# Altium PCB PCB1.PcbDoc
Units mil, origin at the board's own origin, x right, y up, seen from the top; angles counter-clockwise.
Board outline 6000 x 4000 mil, 2 copper layers (Top Layer, Bottom Layer); 25 components, 29 nets, 111 pads, 0 vias.
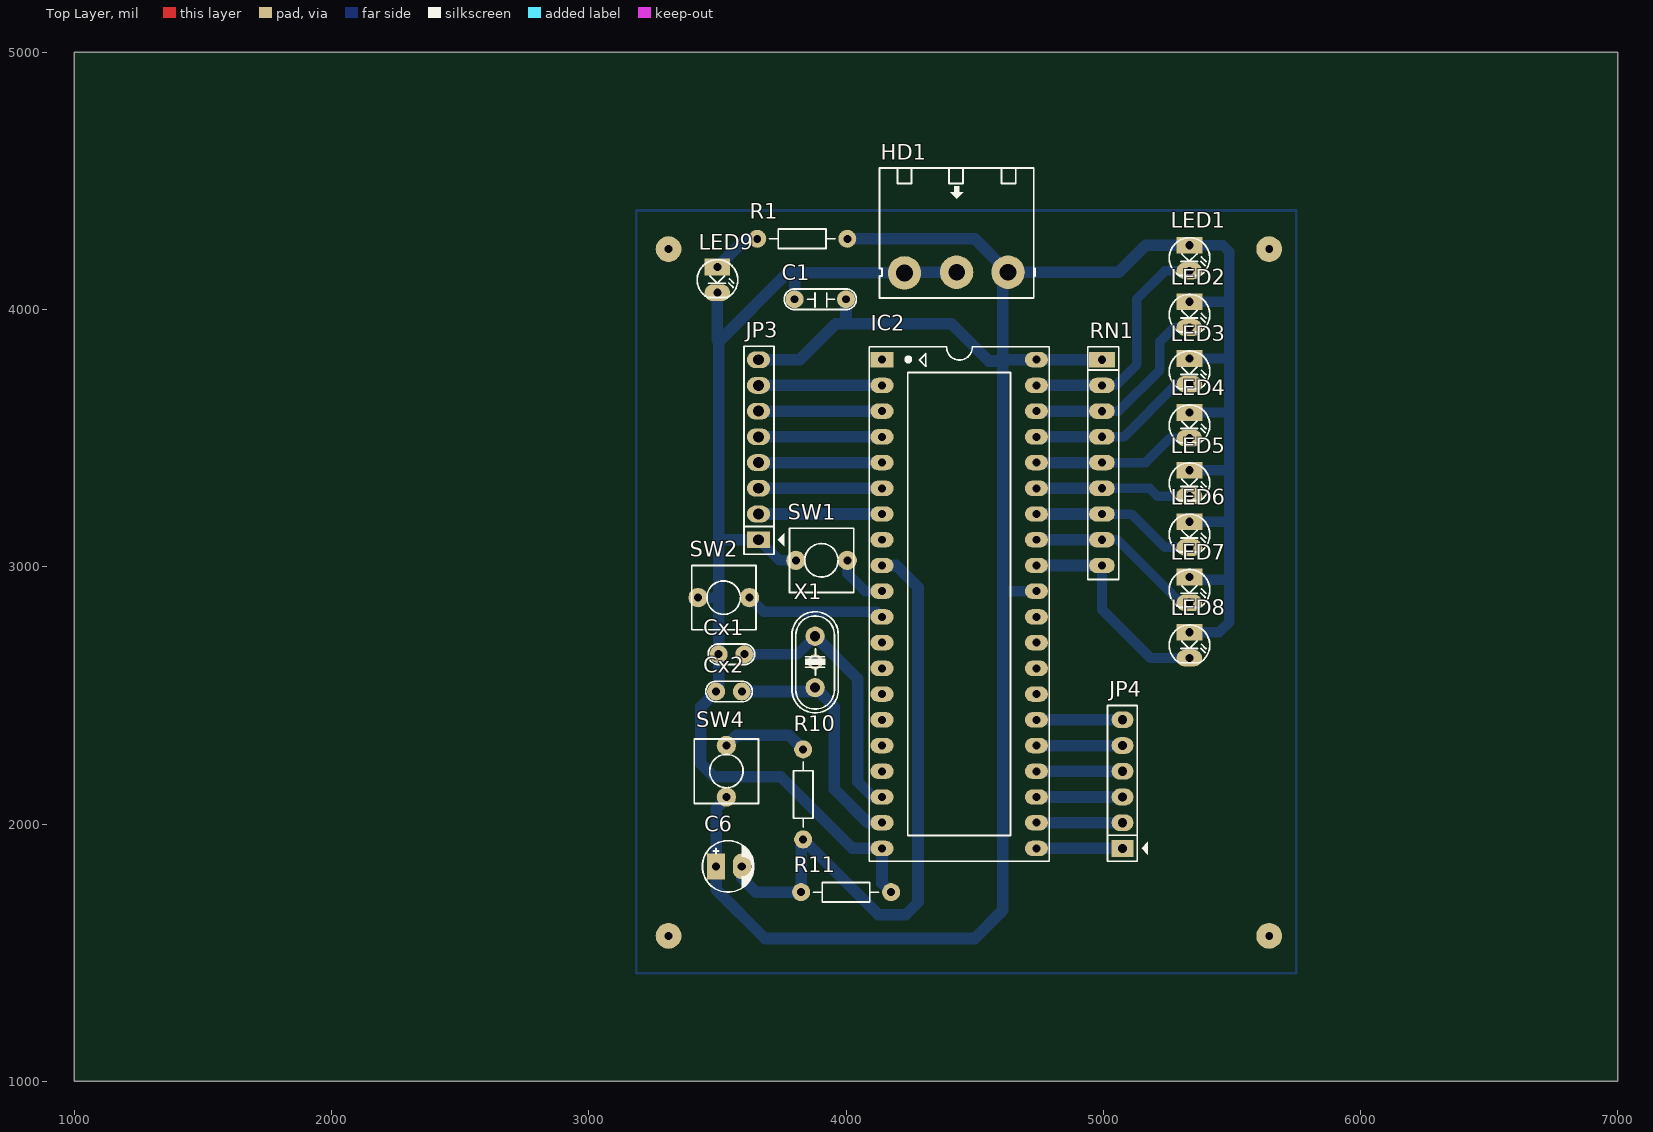
[diagram p0: Top Layer view]
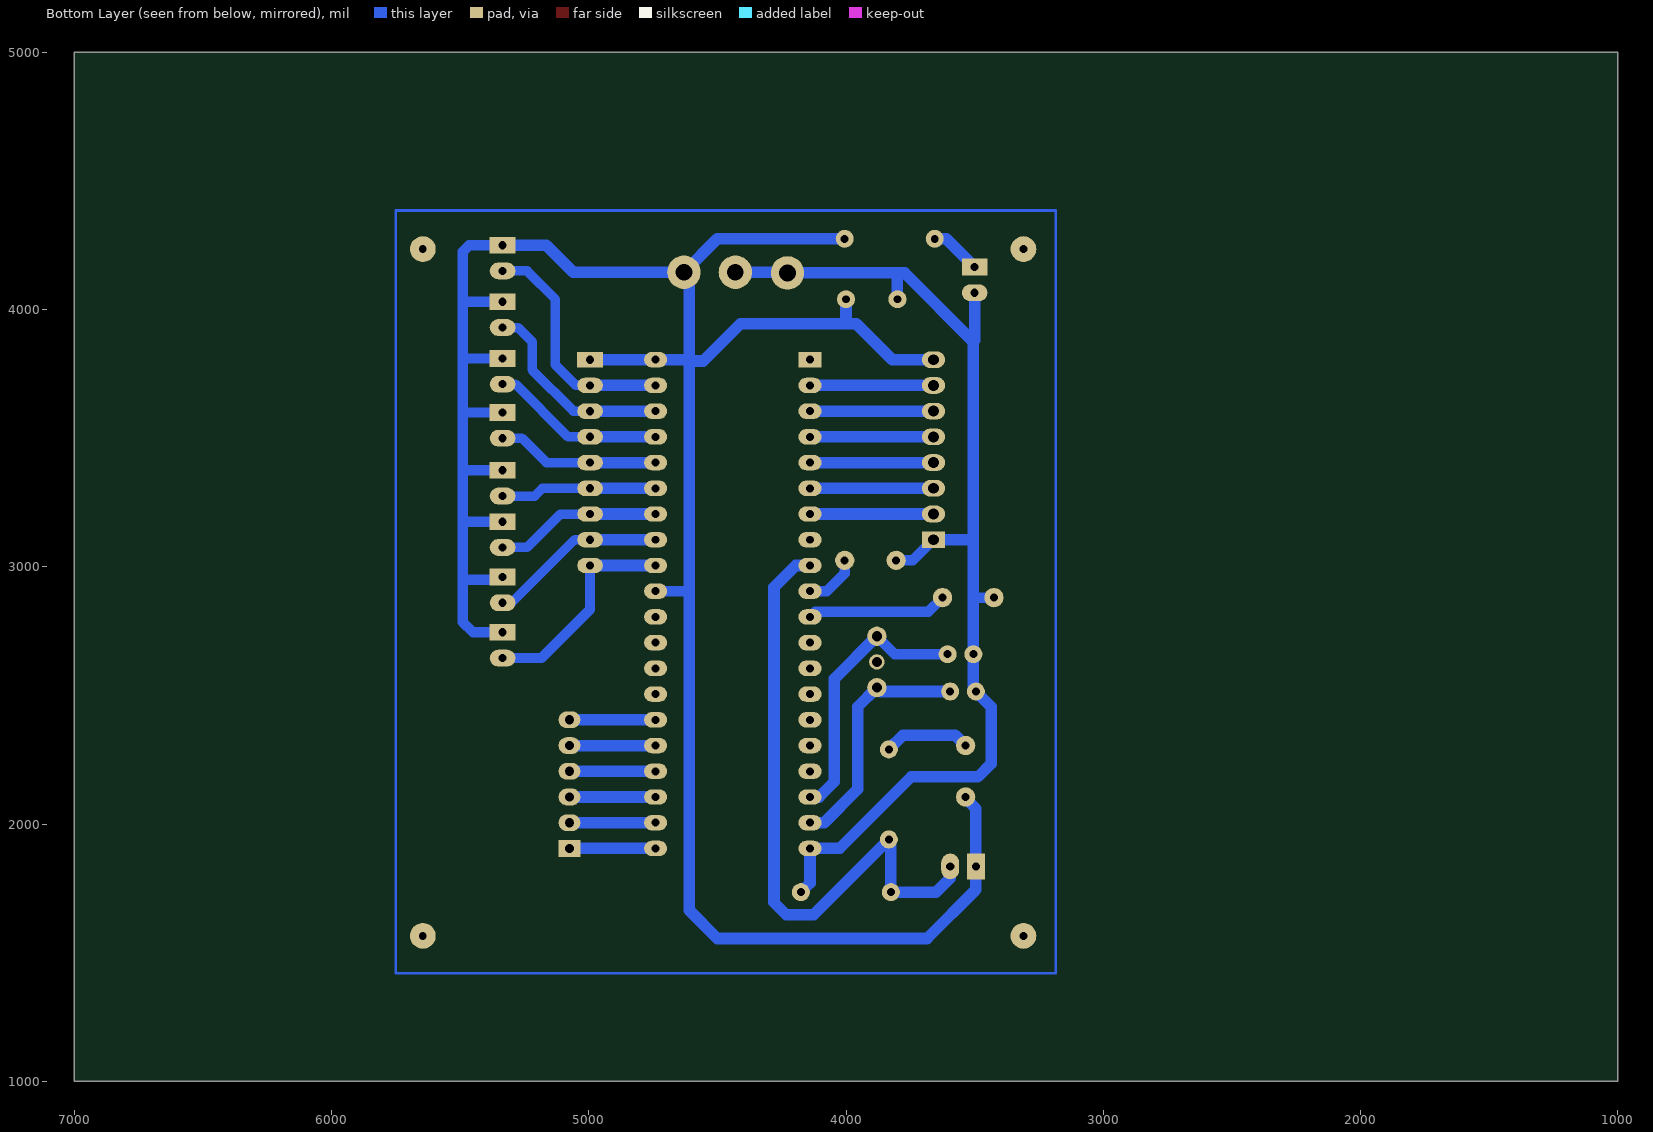
[diagram p1: Bottom Layer view, seen from below]

## Layer stack, top to bottom
Top Solder: solder mask 0.4, Solder Resist, Dk 3.5
Top Layer: signal copper 1.4
Dielectric 1: dielectric 12.6, FR-4, Dk 4.8
Bottom Layer: signal copper 1.4
Bottom Solder: solder mask 0.4, Solder Resist, Dk 3.5

## Board outline
1000,1000 7000,1000 7000,5000 1000,5000

## Design rules (kind name [scope] priority, off if disabled: settings)
Clearance [All] p1: gap=18
PlaneConnect [All] p1: planeconnectstyle=Relief reliefexpansion=20 reliefentries=4 reliefconductorwidth=20 reliefairgap=10
PolygonConnect [All] p1: connectstyle=Relief reliefconductorwidth=20 reliefentries=4 polygonreliefangle="90 Angle" airgapwidth=10
RoomDefinition "Skematic AT89C51" [InComponentClass('Skematic AT89C51')] p1: confinementstyle=ConfineIn formatcopy=TRUE lockcomponents=FALSE outline 7985,815 11315,815 11315,2995 7985,2995
RoutingVias [All] p1: holewidth=35 width=65 viastyle="Through Hole" minholewidth=35 minwidth=65 maxholewidth=35 maxwidth=65
SolderMaskExpansion [All] p1: expansion=4
Width [All] p1: maxlimit=55 minlimit=24 preferedwidth=45
29 further rules are at their usual default settings.

## Components (designator, comment, footprint, x,y, rotation, side; value= is the part's Value field where it differs from the comment)
C1 "104" CN2 4000,4040 r180 top
C6 "10uF" CP1/2 3495,1835 r0 top
Cx1 "33pF" CN1 3605,2660 r180 top
Cx2 "33pF" CN1 3495,2515 r0 top
HD1 "Header 3" HED3T 4630,4145 r180 top
IC2 "AT89C52" DIP40/W0.6 4140,3805 r270 top
JP3 "JP8 PIN" JP8 3660,3105 r90 top
JP4 "JP6 PIN" JP6 5075,1905 r90 top
LED1 "LED" LED-3 5335,4250 r270 top
LED2 "LED" LED-3 5335,4030 r270 top
LED3 "LED" LED-3 5335,3810 r270 top
LED4 "LED" LED-3 5335,3600 r270 top
LED5 "LED" LED-3 5335,3375 r270 top
LED6 "LED" LED-3 5335,3175 r270 top
LED7 "LED" LED-3 5335,2960 r270 top
LED8 "LED" LED-3 5335,2745 r270 top
LED9 "LED" LED-3 3500,4165 r270 top
R1 "1k" R1/4W 4005,4275 r180 top
R10 "100" R1/4W 3833.44,2290 r270 top
R11 "10k" R1/4W 4175.44,1735 r180 top
RN1 "10K" RN8 4995,3805 r270 top
SW1 "SW" SW2 3805,3025 r0 top
SW2 "SW" SW2 3425,2880 r0 top
SW4 "SW" SW2 3535,2305 r270 top
X1 "12Mhz" XT2 3880,2630 r90 top

## Footprints (in the part's own frame and the unit in brackets; to place one, negate y for a bottom-side part, rotate by r counter-clockwise, add the part's x,y. Pads: shape width x height; smd on the part's side, far side on the other; paste and mask are expansions set on the pad)
CN1 [mil]
  round 70 hole 31: 1(0,0) 2(100,0)
  silkscreen extent -40,-40 141,40, body extent -60,-30 170,37, height 265
CN2 [mil]
  round 70 hole 31: 1(0,0) 2(200,0)
  silkscreen extent -40,-40 240,40, body extent -54,-44 260,55, height 407
CP1/2 [mil] "Tu hoa < 22uF/16>50V"
  rect 70x100 hole 32: 1(0,0)
  oval 70x100 hole 32: 2(100,0)
  silkscreen extent -53,-100 147,100, body extent -49,-99 149,99, height 287
DIP40/W0.6 [mil] "40 PIN, W 600mil, Pin to pin 100mil"
  rect 60x90 hole 31: 1(0,0)
  oval 60x90 hole 31: 2(100,0) 3(200,0) 4(300,0) 5(400,0) 6(500,0) 7(600,0) 8(700,0) 9(800,0) 10(900,0) 11(1000,0) 12(1100,0) 13(1200,0) 14(1300,0) 15(1400,0) 16(1500,0) 17(1600,0) 18(1700,0) 19(1800,0) 20(1900,0) 21(1900,600) 22(1800,600) 23(1700,600) 24(1600,600) 25(1500,600) 26(1400,600) 27(1300,600) 28(1200,600) 29(1100,600) 30(1000,600) 31(900,600) 32(800,600) 33(700,600) 34(600,600) 35(500,600) 36(400,600) 37(300,600) 38(200,600) 39(100,600) 40(0,600)
  silkscreen extent -50,-50 1950,650, body extent -82,-10 1982,600, height 224
HED3T [mil] "Header 3, 3 pin, hight 300mil, Pin to Pin 200, Colour Green"
  round 130 hole 65: 1(0,0) 2(200,0) 3(402.62,2.62)
  silkscreen extent -105,-405 500,100, body extent -95,-404 496,68, height 124
JP6 [mil] "JP6"
  rect 65x85 hole 36: 1(0,0)
  oval 65x85 hole 36: 2(100,0) 3(200,0) 4(300,0) 5(400,0) 6(500,0)
  silkscreen extent -50,-99 556,58, body extent -48,-50 548,48, height 323
JP8 [mil] "JP8"
  rect 65x90 hole 42: 1(0,0)
  oval 65x90 hole 42: 2(100,0) 3(200,0) 4(300,0) 5(400,0) 6(500,0) 7(600,0) 8(700,0)
  silkscreen extent -56,-100 752,57, body extent -48,-50 748,48, height 323
LED-3 [mil] "LED 2 PIN, 3ly Only colour"
  rect 65x100 hole 32: 1(0,0)
  oval 65x100 hole 32: 2(100,0)
  silkscreen extent -29,-78 118,79, body extent -29,-75 109,75, height 256
R1/4W [mil] "R 1/4W, 2 Pin, 350mil"
  round 70 hole 31: 1(0,0) 2(350,0)
  silkscreen extent 48,-38 302,38, body extent -40,-47 386,47, height 111
RN8 [mil] "R SIP8, 9 Pin"
  rect 60x100 hole 32: 1(0,0)
  oval 60x100 hole 32: 2(100,0) 3(200,0) 4(300,0) 5(400,0) 6(500,0) 7(600,0) 8(700,0) 9(800,0)
  silkscreen extent -50,-55 855,65, body extent -43,-44 843,5, height 259
SW2 [mil] "SW button 2pin, 250x 250 mil"
  round 75 hole 31: 1(0,0) 2(200,0)
  silkscreen extent -25,-125 225,125
XT2 [mm] "Footpin for Crystal 2 pin"
  round 1.524 hole 1: 0(0,0)
  round 1.905 hole 1: 1(-2.54,0) 2(2.54,0)
  silkscreen extent -5.03,-2.29 4.96,2.29, body extent -5.93,-2.36 5.42,2.29, height 3.5

## Part data
C1: library part CN2, "Cap np 104 => 105pF"
C6: library part CP1, "Cap P  0,1uF < 22uF , 16 - 50V"
Cx1 Cx2: library part CN0, "Cremic For Xtal 1pF => 100pF"
HD1: library part Hed3, "Header 3 (Green)"
IC2: "Atmel AT89C52, 8k Byte Flash Memory , 40 Pin"
JP3: library part JP8
JP4: library part JP6
LED1 LED2 LED3 LED4 LED5 LED6 LED7 LED8 LED9: "LED Single colour Green and Red"
R1 R10 R11: library part R, "Resistor 1/4W"
RN1: library part RN8, "Resistor 8 (Thanh)"
SW1 SW2 SW4: library part SW2, "Switch button 2 pin"
X1: library part XT2, "Crystal For all Crystal 2pin."

## Free pads (board coordinates)
  round 100 hole 30: 2(5645,4235) 7(3310,4235) 8(3310,1565) 9(5645,1565)

## Nets (pads, with @x,y where several pads share a name; then routed paths per layer and width w, separated by ;. In a path a pad name is that pad's centre, name@x,y a point inside that pad or via, vN(x,y) a via of type N, cw(c..) or ccw(c..) an arc to the next point about the centre after c; other vN are vias at no path point)
A: IC2.39 LED1.2 RN1.2 | length 928.7
  Bottom Layer w37: RN1.2 5050,3705 5130,3785 5130,4040 5240,4150 LED1.2
  Bottom Layer w45: IC2.39 RN1.2
B: IC2.38 LED2.2 RN1.3 | length 794.1
  Bottom Layer w37: RN1.3 5060,3605 5220,3765 5220,3875 5275,3930 LED2.2
  Bottom Layer w45: IC2.38 RN1.3
C: IC2.37 LED3.2 RN1.4 | length 679.9
  Bottom Layer w37: RN1.4 5080,3505 5285,3710 LED3.2
  Bottom Layer w45: IC2.37 RN1.4
D: IC2.36 LED4.2 RN1.5 | length 634.4
  Bottom Layer w37: RN1.5 5165,3405 5260,3500 LED4.2
  Bottom Layer w45: IC2.36 RN1.5
E: IC2.35 LED5.2 RN1.6 | length 607.4
  Bottom Layer w37: RN1.6 5180,3305 5210,3275 LED5.2
  Bottom Layer w45: IC2.35 RN1.6
F: IC2.34 LED6.2 RN1.7 | length 648.8
  Bottom Layer w37: RN1.7 5110,3205 5240,3075 LED6.2
  Bottom Layer w45: IC2.34 RN1.7
G: IC2.33 LED7.2 RN1.8 | length 696.5
  Bottom Layer w37: RN1.8 5055,3105 5300,2860 LED7.2
  Bottom Layer w45: IC2.33 RN1.8
GND: C1.2 Cx1.2 Cx2.1 HD1.2 HD1.3 IC2.20 JP3.1 LED9.2 R11.1 SW1.1 SW2.1 | length 4447.2
  Top Layer w10: IC2.20@4130,1895 IC2.20
  Bottom Layer w40: SW2.1@3440,2880 3495,2880 3505,2870 ; JP3.1 3740,3025 SW1.1
  Bottom Layer w45: LED9.2 3500,3880 3505,3875 ; JP3.1 3510,3105 3505,3110 ; C1.2 3800,4137.38 3795,4142.38 ; R11.1 4140,1770.44 IC2.20 4025,1905 3747,2183 3487,2183 3435,2235 3435,2455 Cx2.1 3505,2525 Cx1.2 3505,2870 3505,3110 ; HD1.2 4230,4145 HD1.3 3795,4142.38 ; 3505,3110 3505,3875 ; 3505,3875 3772.38,4142.38 3795,4142.38
H: IC2.32 LED8.2 RN1.9 | length 843.7
  Bottom Layer w40: RN1.9 4995,2835 5185,2645 LED8.2
  Bottom Layer w45: IC2.32 RN1.9
NetCx1_1: Cx1.1 IC2.18 X1.2 | length 1057.2
  Bottom Layer w40: Cx1.1 3810,2660 X1.2
  Bottom Layer w45: X1.2 4045,2565 4045,2165 4105,2105 IC2.18
NetCx2_2: Cx2.2 IC2.19 X1.1 | length 956.1
  Bottom Layer w45: Cx2.2 3865,2515 X1.1 3955,2455 3955,2135 4085,2005 IC2.19
NetIC2_2: IC2.2 JP3.7 | length 480
  Bottom Layer w45: JP3.7 IC2.2
NetIC2_3: IC2.3 JP3.6 | length 480
  Bottom Layer w45: JP3.6 IC2.3
NetIC2_4: IC2.4 JP3.5 | length 480
  Bottom Layer w45: JP3.5 IC2.4
NetIC2_5: IC2.5 JP3.4 | length 480
  Bottom Layer w45: JP3.4 IC2.5
NetIC2_6: IC2.6 JP3.3 | length 480
  Bottom Layer w45: JP3.3 IC2.6
NetIC2_7: IC2.7 JP3.2 | length 480
  Bottom Layer w45: JP3.2 IC2.7
NetIC2_10: IC2.10 SW1.2 | length 214
  Bottom Layer w40: SW1.2 4005,2975 4075,2905 IC2.10
NetIC2_11: IC2.11 SW2.2 | length 546.1
  Bottom Layer w40: SW2.2 3680,2825 4120,2825 IC2.11
NetIC2_21: IC2.21 JP4.1 | length 335
  Bottom Layer w45: IC2.21 JP4.1
NetIC2_22: IC2.22 JP4.2 | length 335
  Bottom Layer w45: IC2.22 JP4.2
NetIC2_23: IC2.23 JP4.3 | length 335
  Bottom Layer w45: IC2.23 JP4.3
NetIC2_24: IC2.24 JP4.4 | length 335
  Bottom Layer w45: IC2.24 JP4.4
NetIC2_25: IC2.25 JP4.5 | length 335
  Bottom Layer w45: IC2.25 JP4.5
NetIC2_26: IC2.26 JP4.6 | length 335
  Bottom Layer w45: IC2.26 JP4.6
NetLED9_1: LED9.1 R1.2 | length 200.6
  Bottom Layer w45: LED9.1 3610,4275 R1.2
NetR10_1: R10.1 SW4.1 | length 339.4
  Bottom Layer w45: SW4.1 3575,2345 3778.44,2345 R10.1 R10.1@3833.44,2291.56
RESET: C6.2 IC2.9 R10.2 R11.2 | length 2493.7
  Bottom Layer w45: C6.2 3595,1790 3650,1735 R11.2 3825.44,1932 R10.2 4125.44,1648 4233,1648 4280,1695 4280,2920 4195,3005 IC2.9
VCC: C1.1 C6.1 HD1.1 IC2.31 IC2.40 JP3.8 LED1.1 LED2.1 LED3.1 LED4.1 LED5.1 LED6.1 LED7.1 LED8.1 R1.1 RN1.1 SW4.2 | length 9938
  Bottom Layer w40: 4610,2905 IC2.31 ; LED8.1 5450,2745 5490,2785 5490,2950 ; LED7.1 5345,2950 5490,2950 ; LED6.1 5485,3175 5490,3180 ; LED5.1 5480,3375 5490,3365 ; LED4.1@5335,3599.19 LED4.1 5485,3600 5490,3595 ; LED3.1 5485,3810 5490,3805 ; LED2.1 5485,4030 5490,4035 ; LED1.1 5465,4250 5490,4225 5490,4035 ; 5490,2950 5490,3180 ; 5490,3180 5490,3365 ; 5490,3365 5490,3595 ; 5490,3595 5490,3805 ; 5490,3805 5490,4035
  Bottom Layer w45: SW4.2 3535,2100 3495,2060 C6.1 3495,1745 3685,1555 4500,1555 4610,1665 4610,2905 4610,3800 ; JP3.8 3820,3805 3960,3945 4005,3945 ; C1.1 4000,3950 4005,3945 ; R1.1 4500,4275 HD1.1 ; RN1.1 IC2.40 4615,3805 4610,3800 ; LED1.1 5165,4250 5060,4145 HD1.1 ; 4005,3945 4410,3945 4555,3800 4610,3800 ; 4610,3800 4610,4125 HD1.1
pads on no net: IC2.1 IC2.8 IC2.12 IC2.13 IC2.14 IC2.15 IC2.16 IC2.17 IC2.27 IC2.28 IC2.29 IC2.30 X1.0
copper on no net: | length 11060
  Bottom Layer w10: 3185,1420 3185,4385 5750,4385 5750,1420 5380,1420 3185,1420